# Altium PCB CarrierBoardreal.PcbDoc (part 2 of 2)
Units mm, origin at the board's own origin, x right, y up, seen from the top; angles counter-clockwise.
Board outline 78.61 x 85.6 mm, 2 copper layers (Top Layer, Bottom Layer), stack 1.6 mm thick; 58 components, 54 nets, 254 pads, 94 vias.
Unrouted connection lines stored in the file: 44.
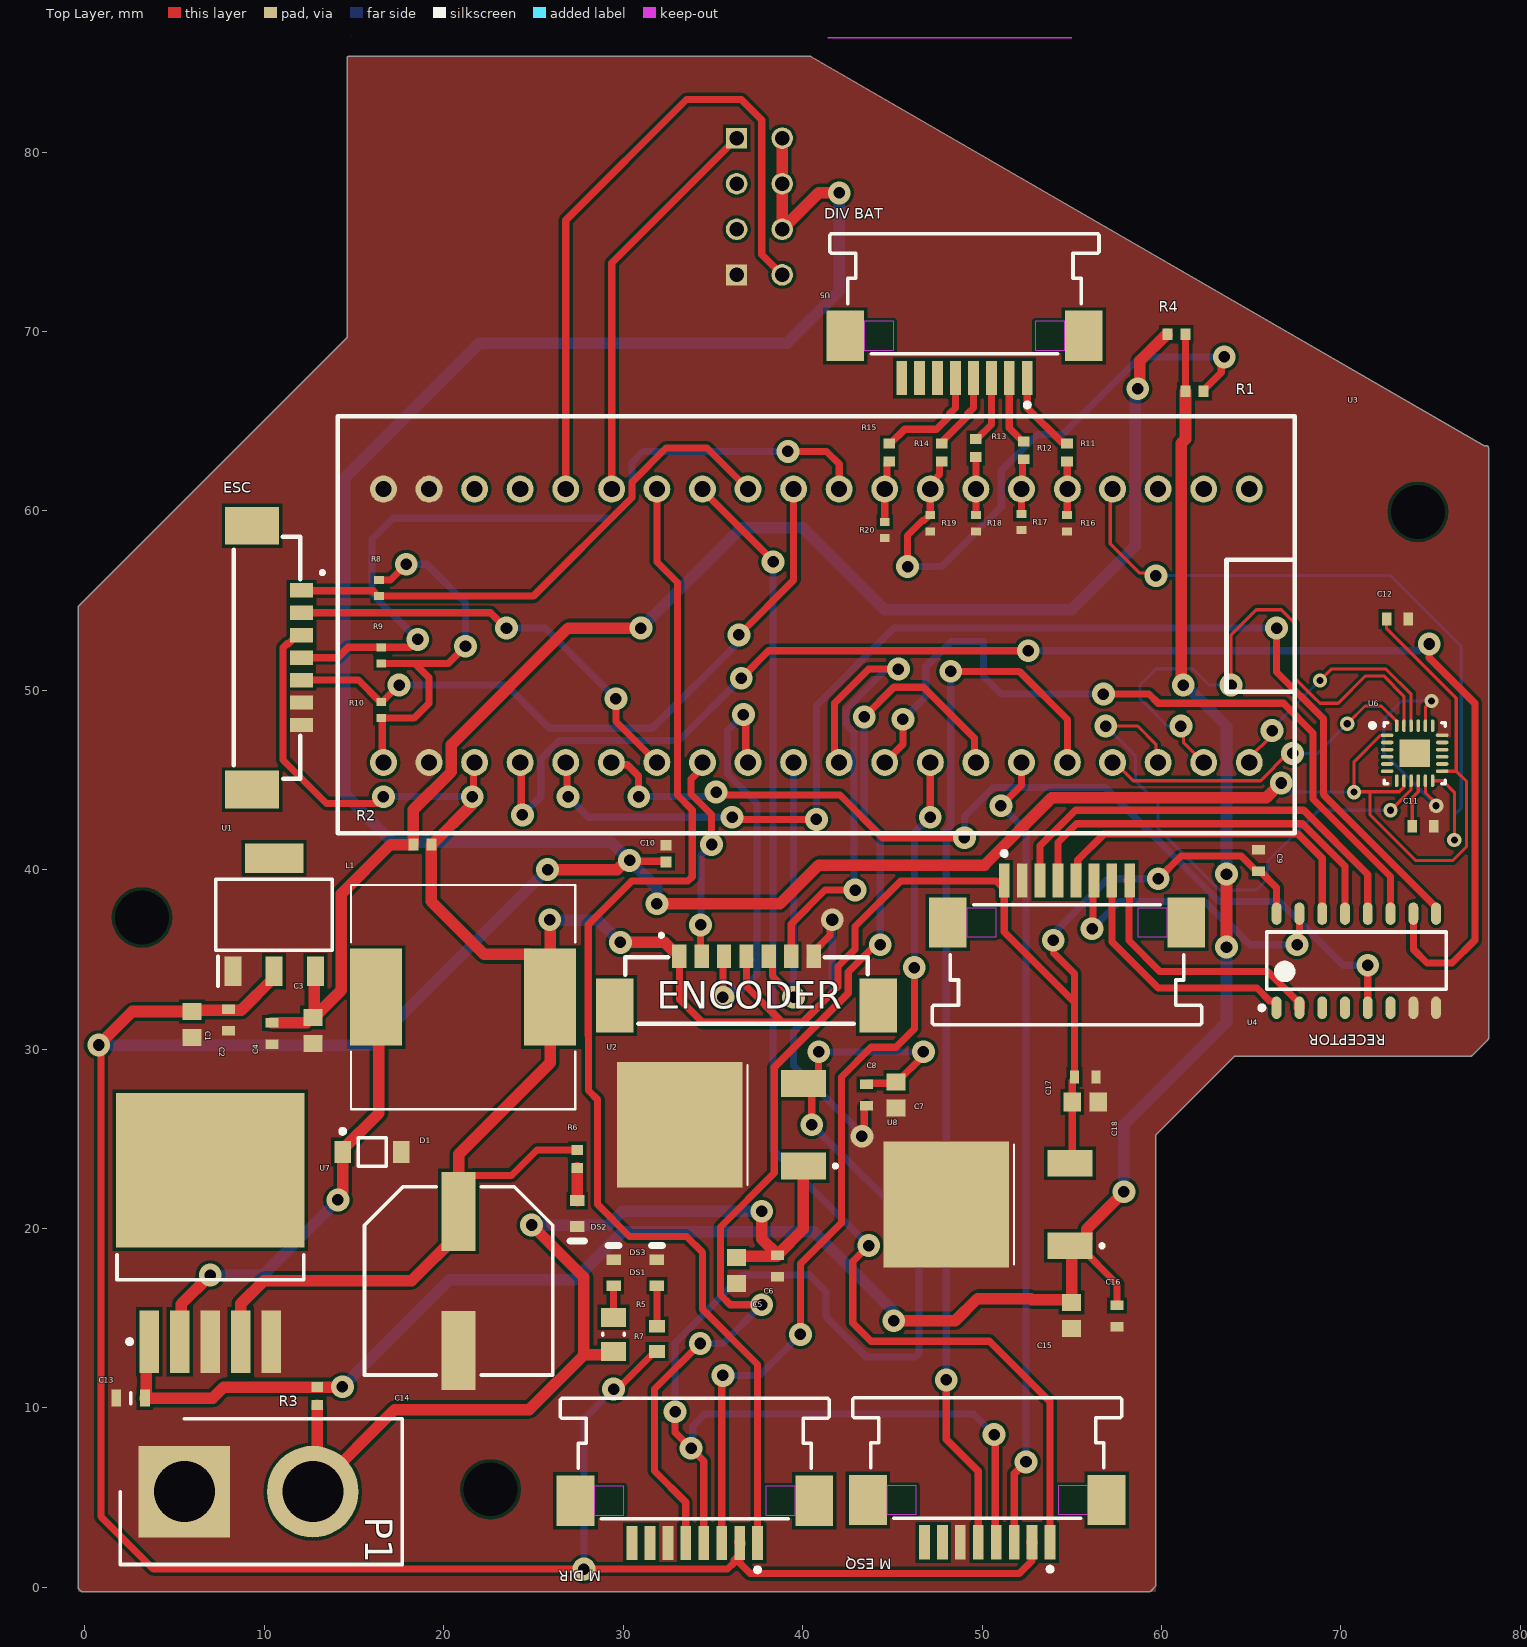
[diagram p0: Top Layer view]

## Via types
v1: diameter 1.27, hole 0.642, Top Layer to Bottom Layer, 86 vias
v2: diameter 0.797, hole 0.4, Top Layer to Bottom Layer, 7 vias
v3: diameter 1.27, hole 0.711, Top Layer to Bottom Layer, 1 vias

## Nets (pads, with @x,y where several pads share a name; then routed paths per layer and width w, separated by ;. In a path a pad name is that pad's centre, name@x,y a point inside that pad or via, vN(x,y) a via of type N, cw(c..) or ccw(c..) an arc to the next point about the centre after c; other vN are vias at no path point) (continued)
"ENCODER E-": (continued)
  Top Layer w0.4: ENCODER.5 38.32,34.979 38.32,34.07 v1(39.497,32.893)
  Bottom Layer w0.4: v1(39.497,32.893) U3.30
INAD: "M DIR.1" U3.14 | length 69.6
  Top Layer w0.4: U3.14 31.877,57.15 33.02,56.007 33.02,44.157 33.852,43.326 33.852,39.604 33.617,39.37 30.48,39.37 28.052,36.942 28.052,30.773 28.067,30.758 28.067,27.686 28.575,27.178 28.575,21.336 30.353,19.558 33.528,19.558 34.417,18.669 34.417,15.494 37.49,12.421 37.49,2.476
INAE: "M ESQ.1" U3.13 | length 71.3
  Top Layer w0.4: U3.13 34.417,61.151 38.354,57.214 v1(38.354,57.15) ; v1(43.688,19.05) 42.799,18.161 42.799,14.732 43.815,13.716 50.419,13.716 53.792,10.343 53.792,2.508
  Bottom Layer w0.4: v1(38.354,57.15) 38.354,24.384 v1(43.688,19.05)
INT: U3.4 U6.12 | length 40.1
  Top Layer w0.178: U3.4 57.15,61.087 57.15,58.166 58.788,56.528 59.55,56.528 v1(59.69,56.388) ; U6.12 75.692,44.958 76.327,44.323 v2(76.327,41.656)
  Bottom Layer w0.178: v1(59.69,56.388) 72.776,56.388 76.708,52.456 76.708,43.434 76.327,43.053 v2(76.327,41.656)
MOTOR_D+: "M DIR.5" U3.34 | length 65.5
  Top Layer w0.4: 33.49,2.476 33.49,4.737 31.75,6.477 31.75,11.049 v1(34.29,13.589) ; v1(37.719,15.748) 35.968,15.748 35.419,16.297 35.419,20.087 38.419,23.087 38.419,28.987 42.545,33.113 42.545,34.29 44.069,35.814 v1(44.323,35.814) ; v1(43.434,48.514) 45.085,50.165 46.736,50.165 49.577,47.324 49.577,46.054 U3.34
  Bottom Layer w0.4: v1(34.29,13.589) 35.56,13.589 v1(37.719,15.748) ; v1(43.434,48.514) 43.434,42.853 44.323,41.964 v1(44.323,35.814)
MOTOR_D-: "M DIR.3" U3.33 | length 50.3
  Top Layer w0.4: 35.49,2.476 35.49,11.741 v1(35.56,11.811) ; v1(39.878,14.097) 39.878,18.034 42.164,20.32 42.164,28.448 43.815,30.099 45.212,30.099 46.228,31.115 v1(46.228,34.544) ; v1(47.117,42.926) U3.33
  Bottom Layer w0.4: v1(35.56,11.811) 37.592,11.811 v1(39.878,14.097) ; v1(46.228,34.544) 46.228,42.037 v1(47.117,42.926)
MOTOR_E+: "M ESQ.5" U3.36 | length 59.4
  Top Layer w0.4: v1(48.006,11.557) 48.006,8.25 49.792,6.465 49.792,2.508 ; v1(48.26,51.054) 52.07,51.054 54.757,48.367 U3.36
  Bottom Layer w0.4: v1(48.006,11.557) 48.006,42.199 48.26,42.453 v1(48.26,51.054)
MOTOR_E-: "M ESQ.3" U3.35 | length 44.8
  Top Layer w0.4: v1(51.054,43.561) 52.197,44.704 U3.35 ; 51.792,2.508 51.792,6.326 v1(52.451,6.985)
  Bottom Layer w0.4: v1(51.054,43.561) 52.451,42.164 v1(52.451,6.985)
MUX_RX: U3.26 U4.5 | length 53.1
  Top Layer w0.4: U3.26 29.464,45.847 30.226,45.847 30.861,45.212 v1(30.861,44.069) ; v1(35.179,44.323) 35.346,44.156 42.077,44.156 44.45,41.783 v1(49.022,41.783) ; U4.5 v1(71.501,34.671)
  Bottom Layer w0.4: v1(30.861,44.069) 34.925,44.069 v1(35.179,44.323) ; v1(49.022,41.783) 49.022,42.961 50.638,44.577 56.866,44.577 63.216,38.227 66.583,38.227 70.139,34.671 v1(71.501,34.671)
NetC3_2: C3.2 C4.2 R2.2 R4.2 U1.3 | length 82.9
  Top Layer w0.642: C4.2 C3.2@12.361,31.461 ; U1.3 12.771,34.269 12.771,31.821 C3.2 12.75,31.75 14.283,33.283 14.283,38.647 17.034,41.398 18.3,41.398 R2.2 18.304,43.335 20.426,45.457 20.426,46.969 26.924,53.467 v1(30.988,53.467) ; v1(58.674,66.802) 58.794,66.922 58.794,68.353 60.291,69.85 R4.2
  Bottom Layer w0.642: v1(30.988,53.467) 36.576,59.055 40.005,59.055 44.577,54.483 54.991,54.483 58.547,58.039 58.547,66.675 v1(58.674,66.802)
NetC11_2: C11.2 U6.10 | length 2.7
  Top Layer w0.178: C11.2 73.984,44.017 74.31,44.343 74.31,44.954 U6.10
NetC13_2: C13.2 C15.2 C16.2 R1.2 R3.2 R4.1 U7.1 U8.1 | length 125
  Top Layer w0.4: C13.2 3.34,10.741 C13.2@3.41,10.811 ; U7.1@3.41,13.516 U7.1 ; v1@14.335,11.16 v1(14.351,11.176) ; 52.705,16.094 52.765,16.034 ; C15.2@54.832,16.034 C15.2 ; U8.1 U8.1@54.991,18.951 ; U8.1@55.406,19.036 57.531,16.911 C16.2 ; R4.1 61.337,69.846 61.337,66.679 R1.2
  Top Layer w0.642: C13.2 7.112,10.541 7.731,11.16 R3.2 v1@14.335,11.16 ; C13.2@3.41,10.811 U7.1@3.41,13.516 ; v1(45.085,14.859) 48.514,14.859 49.749,16.094 52.705,16.094 ; 52.765,16.034 C15.2@54.832,16.034 ; U8.1 55.406,19.036 55.835,19.465 55.835,19.965 v1(57.912,22.042) ; C15.2 U8.1@54.991,18.951 ; v1(61.214,50.292) 61.108,50.398 61.108,63.763 61.341,63.996 R1.2 ; v1(63.627,35.687) v1(63.627,39.751)
  Bottom Layer w0.642: v1(14.351,11.176) 20.32,17.145 27.305,17.145 29.981,19.821 40.631,19.821 45.085,15.367 v1(45.085,14.859) ; v1(57.912,22.042) 57.912,25.781 63.627,31.496 v1(63.627,35.687) ; v1(61.214,50.292) 61.341,50.292 63.627,48.006 v1(63.627,39.751)
NetD1_1: D1.1 L1.1 U7.2 | length 25.6
  Top Layer w0.4: U7.2 U7.2@5.373,13.779
  Top Layer w0.642: U7.2@5.373,13.779 5.373,15.787 v1(6.985,17.399) ; v1(14.097,21.59) 14.097,21.76 14.367,22.03 D1.1 14.367,24.412 16.383,26.428 16.383,32.742 L1.1
  Bottom Layer w0.642: v1(6.985,17.399) 9.906,17.399 v1(14.097,21.59)
"NetDIV BAT_1": "DIV BAT.1" R11.2 | length 3.7
  Top Layer w0.4: 52.522,66.389 52.522,65.739 54.44,63.821 54.662,63.821 R11.2
"NetDIV BAT_2": "DIV BAT.2" R12.2 | length 2.9
  Top Layer w0.4: 51.522,66.389 51.522,64.625 52.274,63.873 R12.2
"NetDIV BAT_3": "DIV BAT.3" R13.2 | length 2.8
  Top Layer w0.4: R13.2 49.707,64 50.522,64.815 50.522,66.389
"NetDIV BAT_4": "DIV BAT.4" R14.2 | length 3.4
  Top Layer w0.4: R14.2 47.802,63.746 47.877,63.821 47.877,63.96 49.2,65.283 49.2,65.417 49.522,65.739 49.522,66.389
"NetDIV BAT_5": "DIV BAT.5" R15.2 | length 5.2
  Top Layer w0.4: R15.2 44.881,63.746 45.687,64.552 47.469,64.552 48.2,65.283 48.2,65.417 48.522,65.739 48.522,66.389
NetDS1_1: DS1.1 R5.1 | length 1.8
  Top Layer w0.381: R5.1 DS1.1
NetDS2_1: DS2.1 R6.1 | length 1.8
  Top Layer w0.642: DS2.1 R6.1
NetDS3_1: DS3.1 R7.1 | length 2.3
  Top Layer w0.4: R7.1 DS3.1
NetRECEPTOR_3: RECEPTOR.3 U4.12 | length 24.7
  Top Layer w0.4: RECEPTOR.3 53.237,41.338 55.206,43.307 67.928,43.307 71.501,39.734 U4.12
NetRECEPTOR_4: RECEPTOR.4 U4.13 | length 22.2
  Top Layer w0.4: RECEPTOR.4 54.237,41.521 55.273,42.557 67.861,42.557 70.231,40.187 U4.13
NetRECEPTOR_5: RECEPTOR.5 U4.14 | length 19
  Top Layer w0.4: RECEPTOR.5 55.337,39.502 55.337,40.533 56.784,41.98 67.621,41.98 68.961,40.64 U4.14
NetRECEPTOR_6: RECEPTOR.6 U4.15 | length 17.6
  Top Layer w0.4: v1(56.134,36.703) 56.186,36.755 56.186,39.351 RECEPTOR.6 ; v1(67.564,35.814) 67.691,35.941 U4.15
  Bottom Layer w0.4: v1(56.134,36.703) 57.661,38.23 62.396,38.23 63.604,37.022 63.724,37.022 64.932,35.814 v1(67.564,35.814)
NetRECEPTOR_7: RECEPTOR.7 U4.1 | length 14.4
  Top Layer w0.4: RECEPTOR.7 57.237,39.33 57.15,39.243 57.237,39.156 57.237,35.981 59.817,33.401 65.32,33.401 66.042,32.679 66.352,32.679 66.421,32.609 U4.1
NetRECEPTOR_8: RECEPTOR.8 U4.2 | length 14.6
  Top Layer w0.4: RECEPTOR.8@58.216,39.381 58.216,38.086 58.188,38.059 58.188,36.045 59.909,34.325 65.924,34.325 U4.2@67.691,32.558
  Top Layer w0.642: RECEPTOR.8@58.216,39.381 RECEPTOR.8 ; U4.2 U4.2@67.691,32.558
SMUX0: U3.25 U4.9 | length 69.7
  Top Layer w0.4: U3.25 26.861,45.911 26.861,44.133 v1(26.924,44.069) ; v1(36.068,42.926) 36.195,42.799 v1(40.767,42.799) ; v1(66.421,53.467) 66.421,51.024 69.031,48.414 69.031,47.864 69.031,46.116 69.031,44.18 75.311,37.9 U4.9
  Bottom Layer w0.4: v1(26.924,44.069) 28.067,42.926 v1(36.068,42.926) ; v1(40.767,42.799) 40.767,49.149 45.085,53.467 v1(66.421,53.467)
SMUX1: U3.24 U4.10 | length 82.5
  Top Layer w0.4: U3.24 24.321,45.911 24.321,43.117 v1(24.384,43.053) ; v1(36.576,50.673) 38.1,52.197 v1(52.578,52.197) ; U4.10 74.041,35.56 74.803,34.798 76.2,34.798 77.47,36.068 77.47,49.276 74.93,51.816 v1(74.93,52.578)
  Bottom Layer w0.4: v1(24.384,43.053) 25.4,44.069 25.4,46.172 26.432,47.204 33.107,47.204 v1(36.576,50.673) ; v1(52.578,52.197) 74.314,52.197 74.695,52.578 v1(74.93,52.578)
SMUX2: U3.32 U4.11 | length 43.6
  Top Layer w0.4: U3.32 45.593,46.99 v1(45.593,48.387) ; v1(56.769,49.784) 59.309,49.784 59.817,49.276 66.802,49.276 68.453,47.625 68.453,46.355 68.453,43.941 72.771,39.623 U4.11
  Bottom Layer w0.4: v1(45.593,48.387) 46.863,49.657 46.863,51.308 48.279,52.724 50.077,52.724 50.077,50.761 51.054,49.784 v1(56.769,49.784)
SPI_CS: U3.40 U6.22 | length 13.9
  Top Layer w0.178: U3.40 64.897,46.228 66.167,47.498 v1(66.167,47.752) ; v2(68.834,50.546) 69.469,51.181 72.517,51.181 73.914,49.784 U6.22
  Bottom Layer w0.178: v1(66.167,47.752) 66.167,47.879 v2(68.834,50.546)
SPI_MISO: U3.38 U6.9 | length 30.1
  Top Layer w0.178: v1(56.896,48.006) 58.674,48.006 59.689,46.991 59.689,46.102 U3.38 ; v2(72.771,43.307) 73.91,44.446 73.91,44.954 U6.9
  Bottom Layer w0.178: v1(56.896,48.006) 58.547,46.355 58.547,44.958 59.817,43.688 59.817,42.286 63.254,38.849 64.259,38.849 64.272,38.862 65.278,38.862 65.913,39.497 65.913,40.455 68.765,43.307 v2(72.771,43.307)
SPI_MOSI: U3.37 U6.24 | length 18.6
  Top Layer w0.178: U3.37 57.404,45.974 58.421,44.957 65.526,44.957 67.051,46.482 v1(67.31,46.482) ; v2(70.358,48.133) 71.348,49.123 72.263,49.123 73.114,48.272 U6.24
  Bottom Layer w0.178: v1(67.31,46.482) 68.707,46.482 v2(70.358,48.133)
SPI_SCK: U3.39 U6.23 | length 31.8
  Top Layer w0.178: v1(61.087,48.006) 61.227,47.866 61.227,47.104 U3.39 ; v1(63.881,50.292) 63.881,53.086 65.278,54.483 66.68,54.483 67.323,53.841 67.323,53.835 67.437,53.721 67.437,50.668 68.461,49.644 68.471,49.644 68.839,49.276 69.85,49.276 71.374,50.8 72.39,50.8 73.514,49.676 U6.23
  Bottom Layer w0.178: v1(61.087,48.006) 60.33,48.006 59.174,49.162 59.169,49.162 58.801,49.53 58.801,50.292 59.703,51.194 61.762,51.194 62.664,50.292 v1(63.881,50.292)
T_ARMA: ESC.1 R8.1 U3.12 | length 29.9
  Top Layer w0.4: ESC.1 12.089,55.542 16.036,55.542 16.333,55.245 R8.1 24.983,55.245 30.485,60.747 30.485,61.6 32.385,63.5 34.671,63.5 U3.12
T_DIR: ESC.5 R10.1 U3.11 | length 38.1
  Top Layer w0.4: ESC.5 15.239,50.566 16.46,49.345 R10.1 16.56,49.345 v1(17.507,50.292) v1@17.526,50.292 ; v1(36.449,53.086) 39.497,56.134 U3.11
  Bottom Layer w0.4: v1(17.507,50.292) 23.476,50.292 25.889,47.879 31.623,47.879 36.449,52.705 v1(36.449,53.086)
T_ESQ: ESC.4 R9.2 U3.10 | length 44.5
  Top Layer w0.4: ESC.4 14.099,51.816 14.676,52.393 R9.2 18.103,52.393 v1(18.542,52.832) ; v1(39.18,63.309) 41.338,63.309 42.037,62.611 U3.10
  Bottom Layer w0.4: v1(18.542,52.832) 16.002,55.372 16.002,58.42 17.165,59.583 29.321,59.583 30.485,60.747 30.485,62.693 31.101,63.309 v1(39.18,63.309) v1@39.243,63.246
UART_RX: U3.15 U5.RX | length 22.4
  Top Layer w0.4: U3.15 29.357,73.807 U5.RX
UART_TX: U3.16 U5.TX | length 38.3
  Top Layer w0.4: U3.16 26.797,76.2 33.528,82.931 36.576,82.931 37.719,81.788 37.719,74.295 U5.TX
VBAT: C5.2 C6.2 P1.2 R3.1 R5.2 U2.1 | length 56.9
  Top Layer w0.4: P1.2 P1.2@12.954,5.588 ; R5.2@29.269,12.952 R5.2
  Top Layer w0.642: R3.1 12.954,5.588 17.272,9.906 24.767,9.906 24.894,10.033 27.813,12.952 ; v1(24.892,20.193) 27.813,17.272 27.813,12.952 ; R5.2@29.269,12.952 27.813,12.952 ; C5.2 36.39,18.446 38.569,18.446 38.608,18.485 C6.2 C6.2@38.608,18.529 ; v1(37.719,20.955) 37.719,19.418 C6.2@38.608,18.529 ; U2.1 40.047,19.968 C6.2@38.608,18.529
  Bottom Layer w0.642: v1(24.892,20.193) 29.194,20.193 29.956,20.955 v1(37.719,20.955)
pads on no net: "DIV BAT.6" "DIV BAT.7" "DIV BAT.8" "DIV BAT.MP1" "DIV BAT.MP2" "M DIR.7" "M DIR.8" "M DIR.MP1" "M DIR.MP2" "M ESQ.7" "M ESQ.8" "M ESQ.MP1" "M ESQ.MP2" ENCODER.8 ENCODER.9 ESC.8 ESC.9 RECEPTOR.MP1 RECEPTOR.MP2 U1.4 U3.1 U3.2 U3.3 U3.17, U3.18 U4.3 U4.4 U4.6 U5.GPIO0 U5.GPIO2 U6.2 U6.3 U6.4 U6.5 U6.6 U6.7 U6.14 U6.15 U6.16 U6.17 U6.19 U6.21 U6.25 U7.6

## Polygon pours and split planes (outlines as drawn)
0 on Top Layer "TOP LAYER-GND" (solid, pour order 30): 14.605,85.344 14.605,69.723 -0.381,54.737 -0.381,-0.254 59.69,-0.254 59.69,25.273 64.008,29.591 77.216,29.591 78.232,30.607 78.232,63.5 65.519,70.843 40.513,85.344
0 on Bottom Layer "BOTTOM LAYER-GND" (solid, pour order 32): 14.605,85.344 14.605,69.723 -0.381,54.737 -0.381,-0.254 59.69,-0.254 59.69,25.273 64.008,29.591 77.216,29.591 78.232,30.607 78.232,63.5 65.724,70.724 40.513,85.344

## Text inside footprints (layer, text, board x,y; h text height)
U3: Mechanical 29 "BLUE PILL" at 57.404,60.198 h0.51 r180